# EAGLE board sensorNodev1_0 (EAGLE 7.2.0)
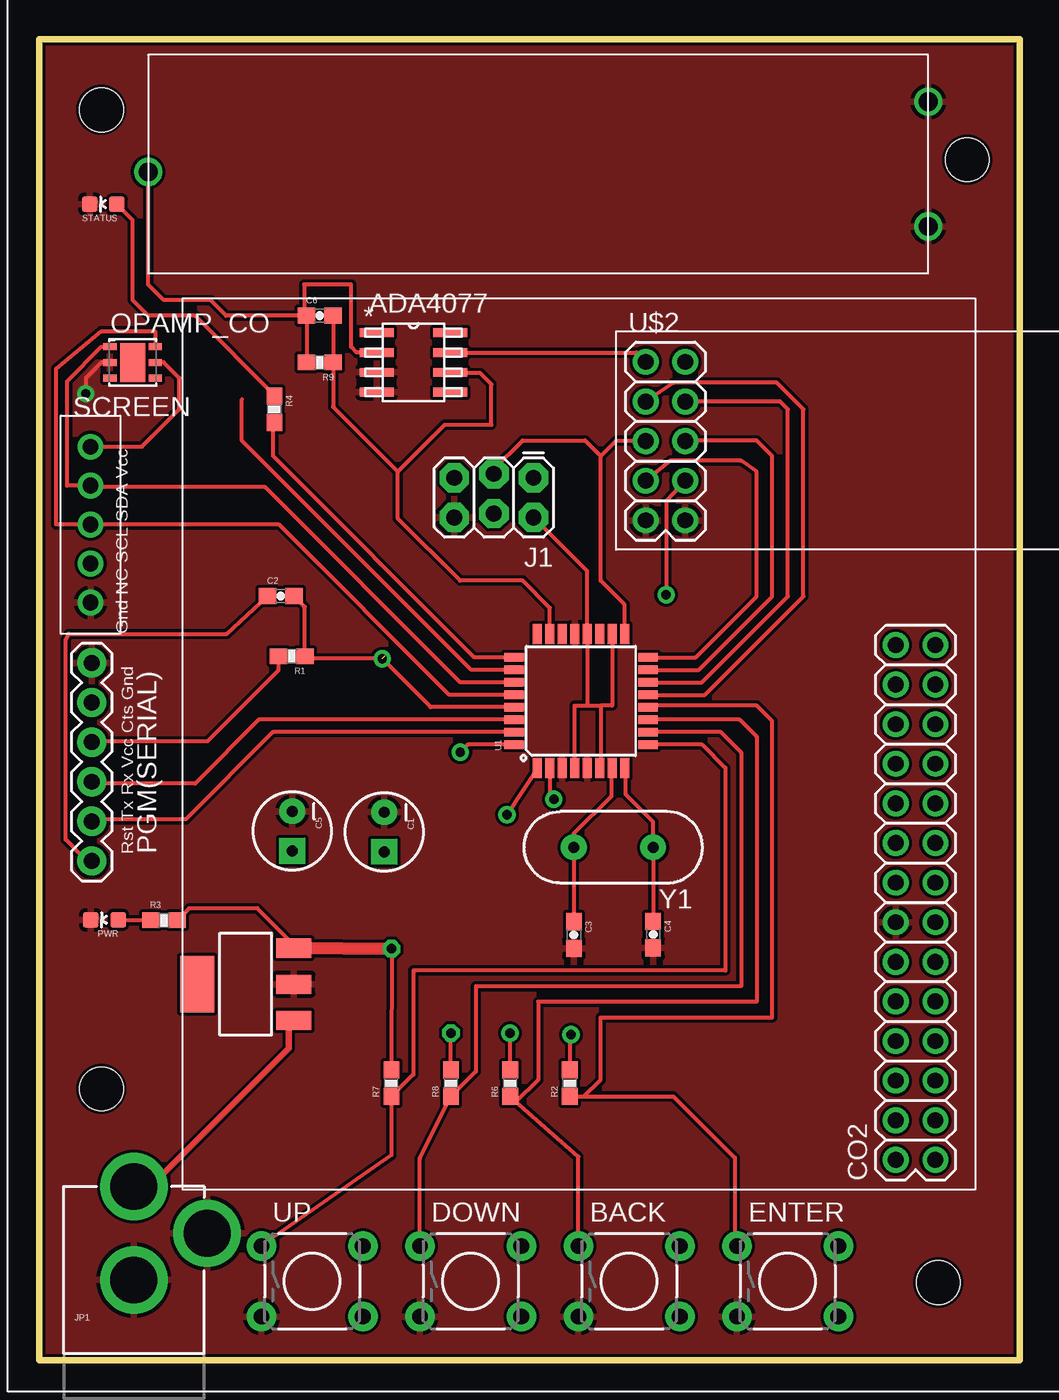
[diagram p0: board, top side]
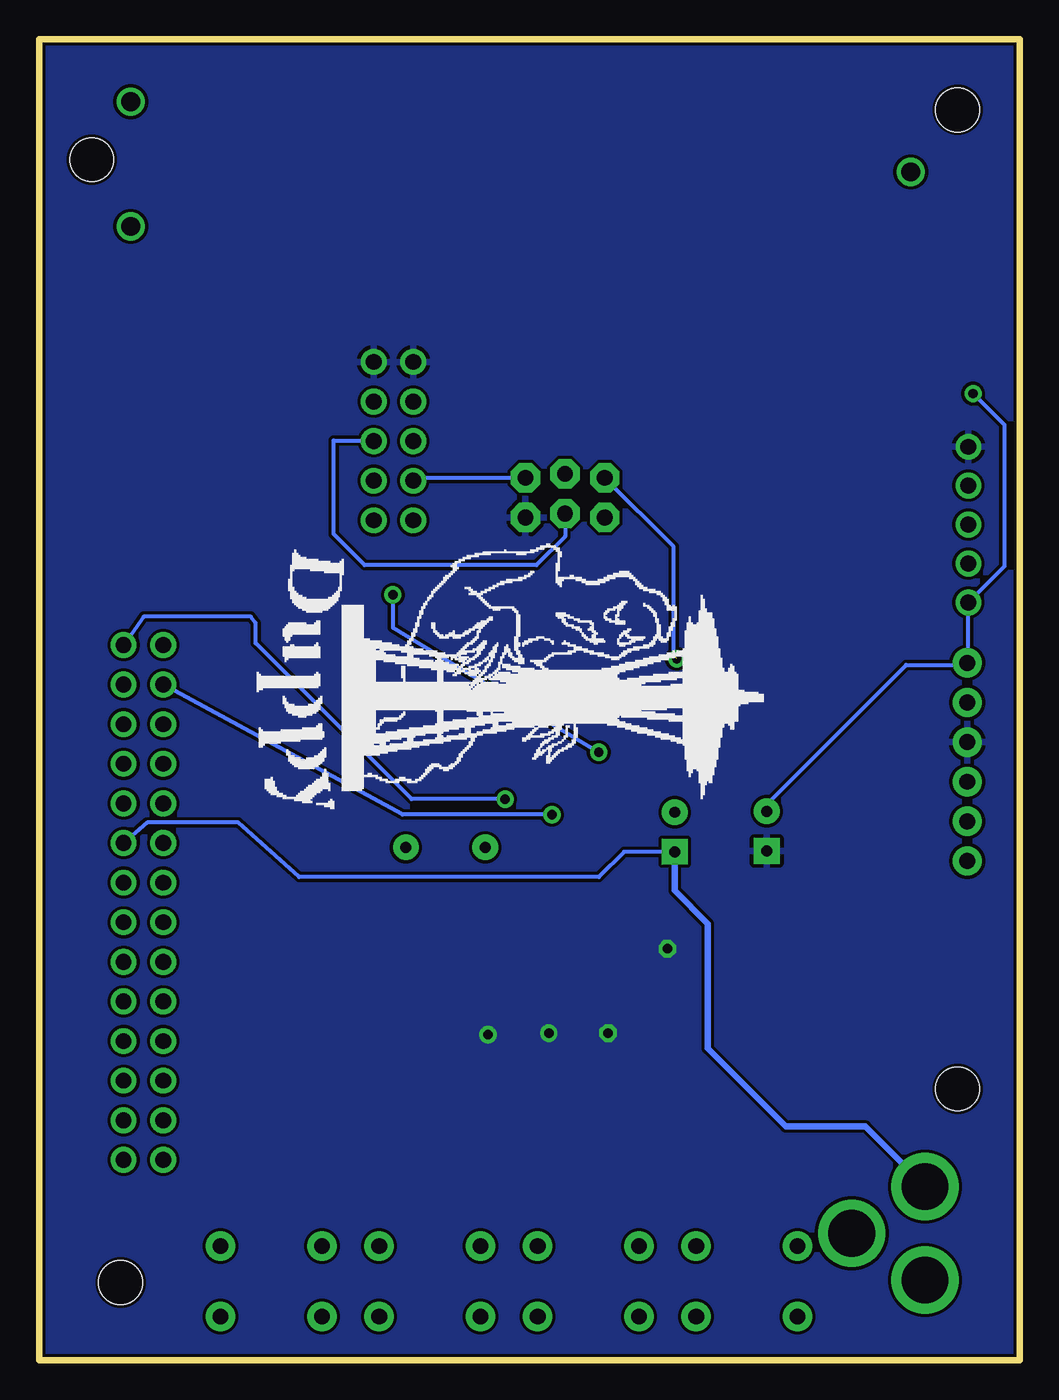
[diagram p1: board, bottom side, seen from below]

Size 62.88 x 84.74 mm. Coordinates in mm from the lower left corner, seen from the top.
Outline: 0,84.74 0,0 62.88,0 62.88,84.74 0,84.74
Copper layers (1*16): Top 0.035mm / dielectric 1.5mm / Bottom 0.035mm
Design rules "SparkFun": minimum track width 8mil, minimum drill 20mil, track to track 8mil, track to pad 8mil, pad to pad 8mil, via to via 8mil, smd to smd 8mil, copper to edge 8mil, drill to drill 8mil, minimum pad ring 12mil, minimum via ring 10mil, stop-mask expansion 4mil, vias tented up to drill 20mil, thermal gap 10mil

## Footprints (pad centres in the part's own frame; a part is rotated, then mirrored left to right if it is on the bottom)
TACTILE-PTH = drill 1.016 pad 1.88: 1 -3.251,2.261; 2 3.251,2.261; 3 -3.251,-2.261; 4 3.251,-2.261
CPOL-RADIAL-10UF-25V = drill 0.7 pad 1.651 square: 1 1.27,0 | drill 0.7 pad 1.651: 2 -1.27,0
0603-CAP = smd 1.1 x 1: 1 -0.85,0; 2 0.85,0
K-30 = drill 1.016 pad 1.651: 1 1.905,2.54; 2 1.905,5.08; 3 4.445,2.54; 4 4.445,5.08; 5 6.985,2.54; 6 6.985,5.08; 7 9.525,2.54; 8 9.525,5.08; 9 12.065,2.54; 10 12.065,5.08; 11 14.605,2.54; 12 14.605,5.08; 13 17.145,2.54; 14 17.145,5.08; 15 19.685,2.54; 16 19.685,5.08; 17 22.225,2.54; 18 22.225,5.08; 19 24.765,2.54; 20 24.765,5.08; 21 27.305,2.54; 22 27.305,5.08; 23 29.845,2.54; 24 29.845,5.08; 25 32.385,2.54; 26 32.385,5.08; 27 34.925,2.54; 28 34.925,5.08
SOT223 = smd 1.219 x 2.235: 1 -2.311,-3.099; 2 0,-3.099; 3 2.311,-3.099 | smd 3.6 x 2.2: 4 0,3.099
2X3_LOCK = drill 1.016 pad 1.88 octagon: 1 0,0; 2 0,2.54; 3 2.54,-0.254; 4 2.54,2.286; 5 5.08,0; 6 5.08,2.54
POWER_JACK_PTH = drill 2.997 pad 4.318: GND 0,7.7; GNDBREAK 4.7,10.7; PWR 0,13.7
DFN6-3X3 = smd 0.85 x 0.45: 1 -1.45,1; 2 -1.45,0; 3 -1.45,-1; 4 1.45,-1; 5 1.45,0; 6 1.45,1 | smd 1.6 x 2.5: EXP 0,0
1X06 = drill 1.016 pad 1.88: 1 0,0; 2 2.54,0; 3 5.08,0; 4 7.62,0; 5 10.16,0; 6 12.7,0
LED-0603 = smd 1 x 1: A 0,-0.877; C 0,0.877
0603-RES = smd 1.1 x 1: 1 -0.85,0; 2 0.85,0
JST-B5B-ED-A = drill 1.016 pad 1.651: 1 1.905,11.989; 2 1.905,9.5; 3 1.905,7.01; 4 1.905,4.496; 5 1.905,2.007
TQFP32-08 = smd 1.27 x 0.559: 1 -4.293,2.8; 2 -4.293,2; 3 -4.293,1.2; 4 -4.293,0.4; 5 -4.293,-0.4; 6 -4.293,-1.2; 7 -4.293,-2; 8 -4.293,-2.8; 17 4.293,-2.8; 18 4.293,-2; 19 4.293,-1.2; 20 4.293,-0.4; 21 4.293,0.4; 22 4.293,1.2; 23 4.293,2; 24 4.293,2.8 | smd 0.559 x 1.27: 9 -2.8,-4.293; 10 -2,-4.293; 11 -1.2,-4.293; 12 -0.4,-4.293; 13 0.4,-4.293; 14 1.2,-4.293; 15 2,-4.293; 16 2.8,-4.293; 25 2.8,4.293; 26 2,4.293; 27 1.2,4.293; 28 0.4,4.293; 29 -0.4,4.293; 30 -1.2,4.293; 31 -2,4.293; 32 -2.8,4.293
R_8 = smd 2.184 x 0.559: 1 -2.362,1.905; 2 -2.362,0.635; 3 -2.362,-0.635; 4 -2.362,-1.905; 5 2.362,-1.905; 6 2.362,-0.635; 7 2.362,0.635; 8 2.362,1.905
TGS5042 = drill 1.2: CE 50,3; CE1 50,11; WE 0,6.5
NRF24L01 = drill 1.016 pad 1.651: 1 1.89,12.035; 2 4.43,12.035; 3 1.89,9.495; 4 4.43,9.495; 5 1.89,6.955; 6 4.43,6.955; 7 1.89,4.415; 8 4.43,4.415; 9 1.89,1.875; 10 4.43,1.875
CONTAINER_BOTTOM = hole 2.8: 59.65,7; 61.5,79; 6,82.19; 6,19.415
HC49US = drill 0.7 pad 1.651: 1 -2.54,0; 2 2.54,0

## Placement (x,y rotation side)
BACK  SWITCH-MOMENTARY-2PTH  [TACTILE-PTH]  37.83,5.08 0 top
C1  10uF  [CPOL-RADIAL-10UF-25V]  22.13,33.89 270 top
C2  0.1uF  [0603-CAP]  15.5,49.02 0 top
C3  22pF  [0603-CAP]  34.28,27.29 270 top
C4  22pF  [0603-CAP]  39.36,27.31 270 top
C5  10uF  [CPOL-RADIAL-10UF-25V]  16.23,33.95 270 top
C6  22pF  [0603-CAP]  18,67 0 top
CO2  K-30K-30  [K-30]  60,10.96 90 top
DOWN  SWITCH-MOMENTARY-2PTH  [TACTILE-PTH]  27.67,5.08 0 top
ENTER  SWITCH-MOMENTARY-2PTH  [TACTILE-PTH]  47.99,5.08 0 top
IC1  V_REG_MIC2920  [SOT223]  13.24,24.13 90 top
J1  AVR_SPI_PRG_62X3_LOCK  [2X3_LOCK]  31.7,56.6 180 top
JP1  POWER_JACKPTH  [POWER_JACK_PTH]  6.08,-2.54 0 top
OPAMP_CO  SI7021-A10-GM  [DFN6-3X3]  6,64 0 top
PGM(SERIAL)  [1X06]  3.38,32.03 90 top
PWR  [LED-0603]  4.19,28.26 90 top
R1  1K  [0603-RES]  16.2,45.16 180 top
R2  1K  [0603-RES]  34.02,17.78 90 top
R3  220  [0603-RES]  8.01,28.23 0 top
R4  220  [0603-RES]  15.09,60.99 270 top
R6  1K  [0603-RES]  30.21,17.78 90 top
R7  1K  [0603-RES]  22.59,17.78 90 top
R8  1K  [0603-RES]  26.4,17.78 90 top
R9  1M  [0603-RES]  18,64 180 top
SCREEN  JST-B5B-EH-A  [JST-B5B-ED-A]  1.4,46.6 0 top
STATUS  [LED-0603]  4.12,74.14 90 top
U1  ATMEGA328P_TQFP  [TQFP32-08]  34.74,42.29 90 top
U2  ADA4077-1ARZ  [R_8]  24,64 0 top
U$1  TGS5042A  [TGS5042]  7,69.72 0 top
U$2  NRF24L01  [NRF24L01]  37,52 0 top
U$3  [DUPPY_LOGO]  50,55 270 bottom
U$4  [CONTAINER_BOTTOM]  -2,-2 0 top
UP  SWITCH-MOMENTARY-2PTH  [TACTILE-PTH]  17.51,5.08 0 top
Y1  [HC49US]  36.82,32.91 180 top

## Library data of the parts
BACK DOWN ENTER UP = SparkFun-Electromechanical
C1 C5 = SparkFun-Capacitors
C2 = SparkFun-Capacitors; PROD_ID: CAP-00810
C3 C4 C6 = SparkFun-Capacitors; PROD_ID: CAP-07876
CO2 SCREEN U2 U$1-U$4 = bespin
IC1 = SparkFun-PowerIC
J1 PGM(SERIAL) = SparkFun-Connectors
JP1 = SparkFun-Connectors; PROD_ID: CONN-08197
OPAMP_CO = bespin; MF: Silicon Labs; MPN: Si7021-A10-GM; OC_FARNELL: 2422571; OC_NEWARK: 55X3111
PWR STATUS = SparkFun-LED
R1-R4 R6-R9 = SparkFun-Resistors; PROD_ID: RES-07856
U1 = SparkFun-DigitalIC; PROD_ID: IC-09069
Y1 = SparkFun-FreqCtrl

## Nets
5V: C1.1 CO2.17 IC1.1 JP1.PWR
ADA_OUT: C6.2 R9.1 U1.23 U2.6
BACK: BACK.1 R6.1 U1.11
CE: U1.13 U$2.3
CSN: U1.14 U$2.4
DOWN: DOWN.1 R8.1 U1.10
DTHP: U1.26
DTR: C2.1 PGM(SERIAL).1
ENTER: ENTER.1 R2.1 U1.12
GND: BACK.3 C1.2 C3.2 C4.2 C5.2 CO2.14 DOWN.3 ENTER.3 IC1.2 J1.6 JP1.GND JP1.GNDBREAK OPAMP_CO.2 PGM(SERIAL).6 PWR.C SCREEN.5 STATUS.C U1.3 U1.5 U1.21 U2.3 U2.4 U$1.CE U$1.CE1 U$2.9 U$2.10 UP.3
IRQ: U1.32 U$2.8
LED1: R4.2 U1.25
MISO: J1.1 U1.16 U$2.7
MOSI: J1.4 U1.15 U$2.6
N$1: C3.1 U1.7 Y1.2
N$2: C4.1 U1.8 Y1.1
N$4: PWR.A R3.1
N$5: R4.1 STATUS.A
N$12: C6.1 R9.2 U2.2 U$1.WE
RESET: C2.2 J1.5 R1.1 U1.29
RX: PGM(SERIAL).3 U1.30
RX_K30: CO2.26 U1.1
SCK: J1.3 U1.17 U$2.5
SCL: OPAMP_CO.6 SCREEN.3 U1.28
SDA: OPAMP_CO.1 SCREEN.2 U1.27
TX: PGM(SERIAL).2 U1.31
TX_K30: CO2.27 U1.2
UP: R7.1 U1.9 UP.1
VCC: C5.1 IC1.3 J1.2 OPAMP_CO.5 PGM(SERIAL).4 R1.2 R2.2 R3.2 R6.2 R7.2 R8.2 SCREEN.1 U1.4 U1.6 U1.18 U1.20 U2.7 U$2.1 U$2.2

## Tracks (layer width: path | path; a pad name or v marks a point on that pad's centre or on a via)
5V
  Top 0.406: JP1.PWR 7.16,11.16 16,20 16,21.48 IC1.1
  Bottom 0.254: C1.1 25.38,32.62 27,31 46.2,31 50.1,34.5 55.94,34.5 CO2.17
  Bottom 0.406: C1.1 22.13,30.13 20,28 20,20 15,15 9.92,15 JP1.PWR
ADA_OUT
  Top 0.254: C6.2 R9.1 18.85,61.15 23,57 | U1.23 32.74,48.26 31,50 27,50 23,54 23,57 | 23,57 26,60 29,60 29,62.6 28.3,63.3 26.43,63.3 U2.6
BACK
  Top 0.254: BACK.1 34.58,13.06 30.57,16.57 | 30.57,16.57 R6.1 | 30.57,16.57 32,18 32,23 46,23 46,40 44.91,41.09 U1.11
CE
  Top 0.254: U1.13 42.69,42.69 49,49 49,61 47.3,62.7 40.7,62.7 U$2.3
CSN
  Top 0.254: U1.14 42.49,43.49 48,49 48,61 47.5,61.5 U$2.4
DOWN
  Top 0.254: DOWN.1 24.42,12.95 R8.1 28,18.53 28,24 45,24 45,39 43.71,40.29 U1.10
DTHP
  Top 0.254: U1.26 27.71,44.29 13,59 13,61.63
DTR
  Top 0.254: PGM(SERIAL).1 3.07,32.03 1.7,33.4 1.7,46.2 1.9,46.6 12.03,46.6 C2.1
ENTER
  Top 0.254: R2.1 34.93,16.93 | 34.93,16.93 36,18 36,22 47,22 47,41 46,42 39.14,42 U1.12 | 34.93,16.93 40.67,16.93 44.6,13 44.6,7.48 ENTER.1
GND  (via drill 0.6)
  Top 0.254: OPAMP_CO.2 4,64 3,63 v3,62
  Bottom 0.254: C5.2 16.23,35.67 7.3,44.6 3.51,44.6 PGM(SERIAL).6 3.31,44.73 SCREEN.5 1,50.91 1,60 v3,62
  pour Top: 0,84.74 0,0 62.88,0 62.88,84.74
IRQ  (via drill 0.6)
  Top 0.254: U$2.8 41.41,56.41 40.2,55.1 v40.2,49.1 | U1.32 27.49,39.49 v27,39
  Bottom 0.254: v40.2,49.1 40.2,47 v27,39
LED1
  Top 0.254: U1.25 27.91,45.09 15,58 15,60.05 R4.2
MISO
  Top 0.254: U1.16 42.09,45.09 46,49 46,57 45,57.7 40.48,57.7 U$2.7
  Bottom 0.254: J1.1 38.7,56.6 U$2.7
MOSI
  Top 0.254: U1.15 42.29,44.29 47,49 47,58 46,59 41.48,59 U$2.6
  Bottom 0.254: J1.4 29.16,52.84 31,51 42,51 44,53 44,59 41.48,59 U$2.6
N$1
  Top 0.254: C3.1 Y1.2 34.28,33.78 36.7,36.2 36.7,37.96 U1.7
N$2
  Top 0.254: C4.1 Y1.1 39.36,34.54 37.6,36.3 37.6,37.94 U1.8
N$4
  Top 0.254: R3.1 5.1,28.23 PWR.A
N$5
  Top 0.254: R4.1 15.09,61.91 10,67 7,67 6,68 6,73.14 STATUS.A
N$12
  Top 0.254: C6.1 R9.2 | C6.1 12,67 11,68 8,68 7,69 U$1.WE 7,76.3 | U2.2 20.36,64.64 20,65 20,69 17,69 17,67.15 C6.1
RESET  (via drill 0.6)  (1 unrouted)
  Top 0.254: U1.29 25.11,41.89 v22,45 17.21,45 R1.1 | 17.09,45.2 R1.1 | R1.1 17.05,48.32 C2.2
  Bottom 0.254: 22.2,45.2 22.2,52.18 J1.5
RX
  Top 0.254: U1.30 14.09,41.09 10,37 3.49,37 PGM(SERIAL).3
RX_K30  (via drill 0.6)
  Top 0.254: U1.1 31.94,37.94 v30,35
  Bottom 0.254: v30,35 39.58,35 CO2.26
SCK
  Top 0.254: U1.17 37.54,48.46 36,50 36,58 | 36,58 37,59 38.84,59 U$2.5 | J1.3 29.16,57.16 31,59 35,59 36,58
SCL
  Top 0.254: U1.28 26.31,42.69 15.4,53.6 SCREEN.3 1.1,53.61 1.1,63.6 4,66 7.45,66 OPAMP_CO.6
SDA
  Top 0.254: U1.27 27.01,43.49 14.5,56 3.31,56 SCREEN.2 1.8,56.1 1.8,62.8 4,65 OPAMP_CO.1
TX
  Top 0.254: U1.31 14.99,40.29 9.4,34.7 3.51,34.7 PGM(SERIAL).2
TX_K30  (via drill 0.6)
  Top 0.254: U1.2 32.74,36.26 v33,36
  Bottom 0.254: v33,36 39,36 49,46 49,47.3 49.3,47.7 56.18,47.7 CO2.27
UP
  Top 0.254: UP.1 22.59,13.17 R7.1 24,18.34 24,25 44,25 44,38 42.51,39.49 U1.9
VCC  (via drill 0.6, 0.6 pad 0.81)
  Top 0.254: R1.2 15.35,44.25 10.8,39.7 3.43,39.7 PGM(SERIAL).4 | U1.4 34.34,42 35.14,42 | 35.14,42 36,42 | 36,42 36,38 U1.6 | 35.14,42 U1.20 35.14,50.62 J1.2 | U1.18 36.74,42 36,42 | IC1.3 16.34,26.66 14,29 9.63,29 R3.2 | R6.2 v30.2,21 | R2.2 v34.1,20.9 | v22.6,26.4 R7.2 | R8.2 v26.4,21 | 38.89,64.64 U$2.1 38.29,64.64 U2.7 | SCREEN.1 6.59,58.59 9,61 9,63 8,64 OPAMP_CO.5
  Top 0.813: IC1.3 v22.6,26.4
  pour Bottom: 0,84.74 62.88,84.74 62.88,0 0,0

## Text on the board
tNames: Gnd NC SCL SDA Vcc | Rst Tx Rx Vcc Cts Gnd